# EAGLE board Sine 5KW 4 (EAGLE 6.6.0)
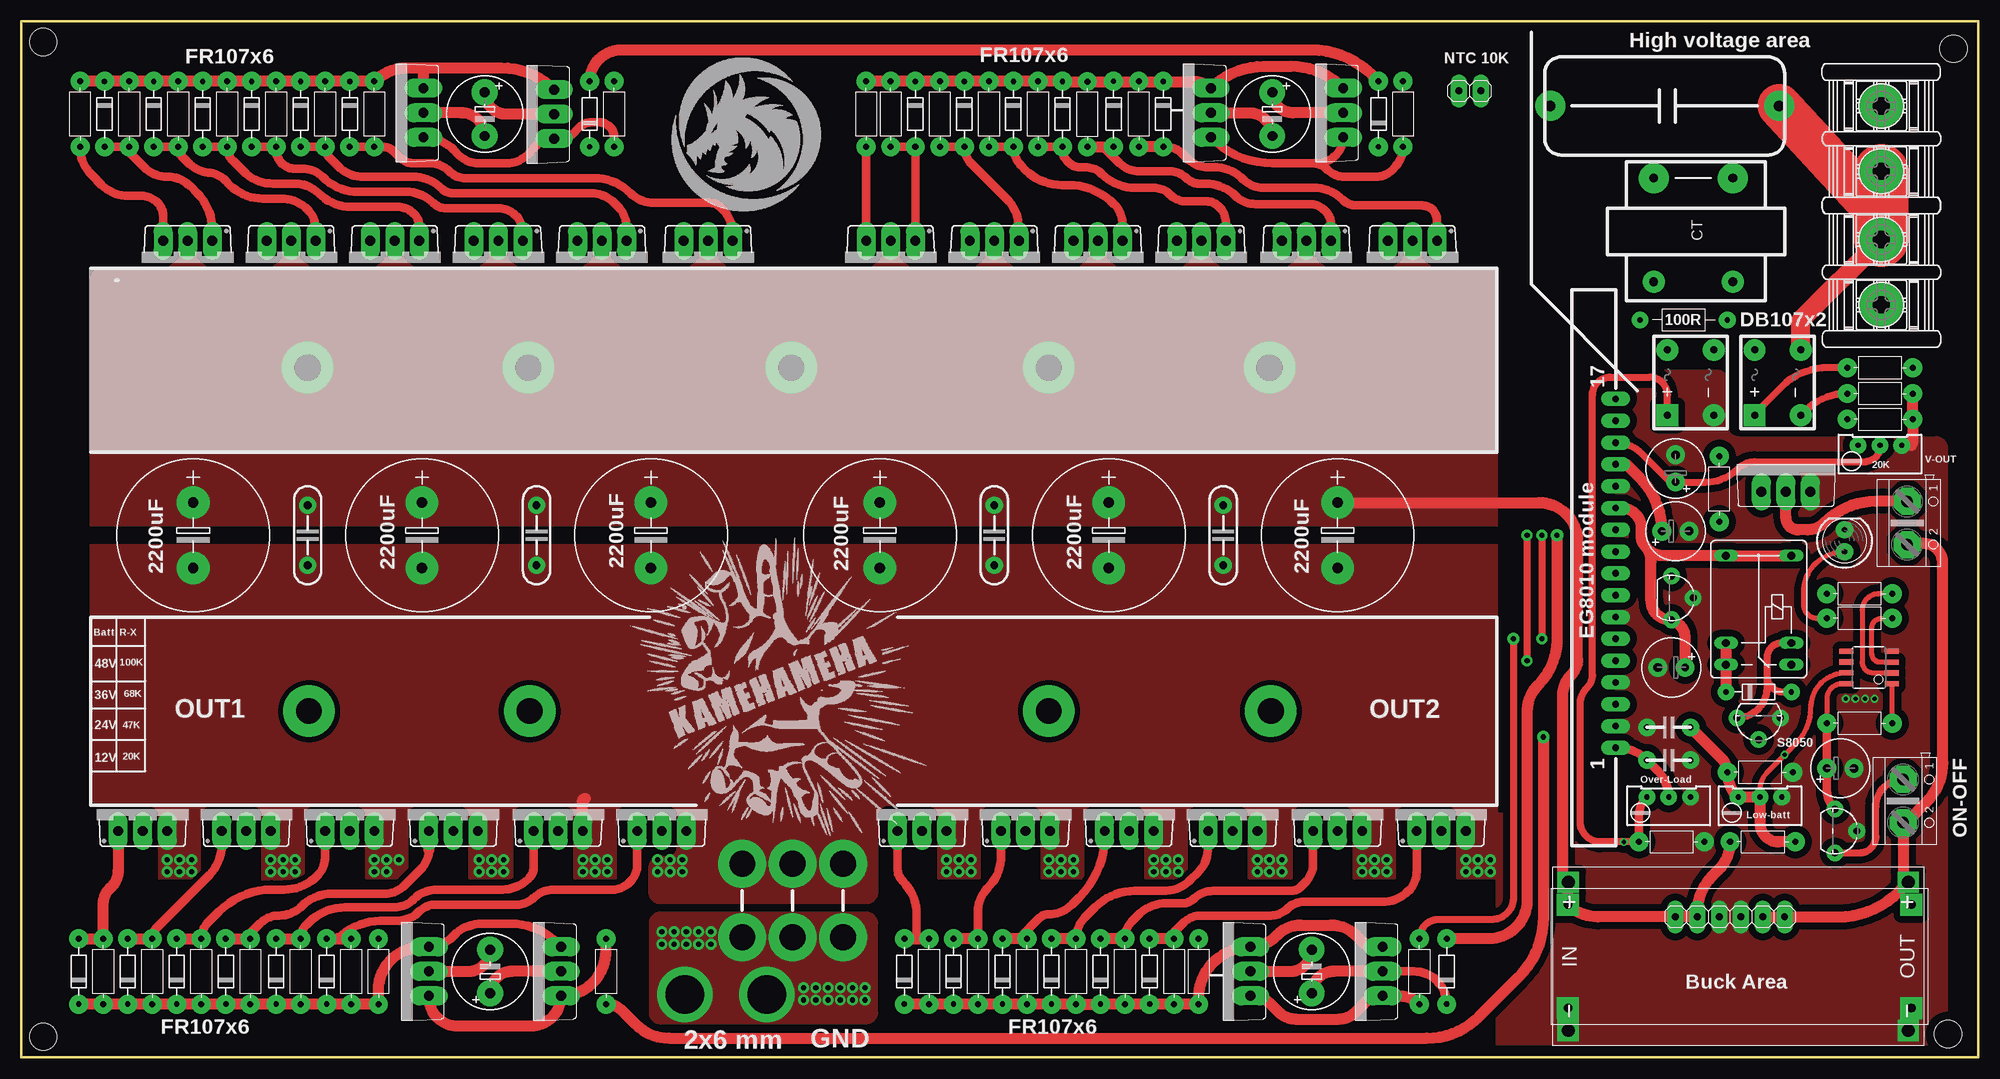
[diagram p0: board, top side]
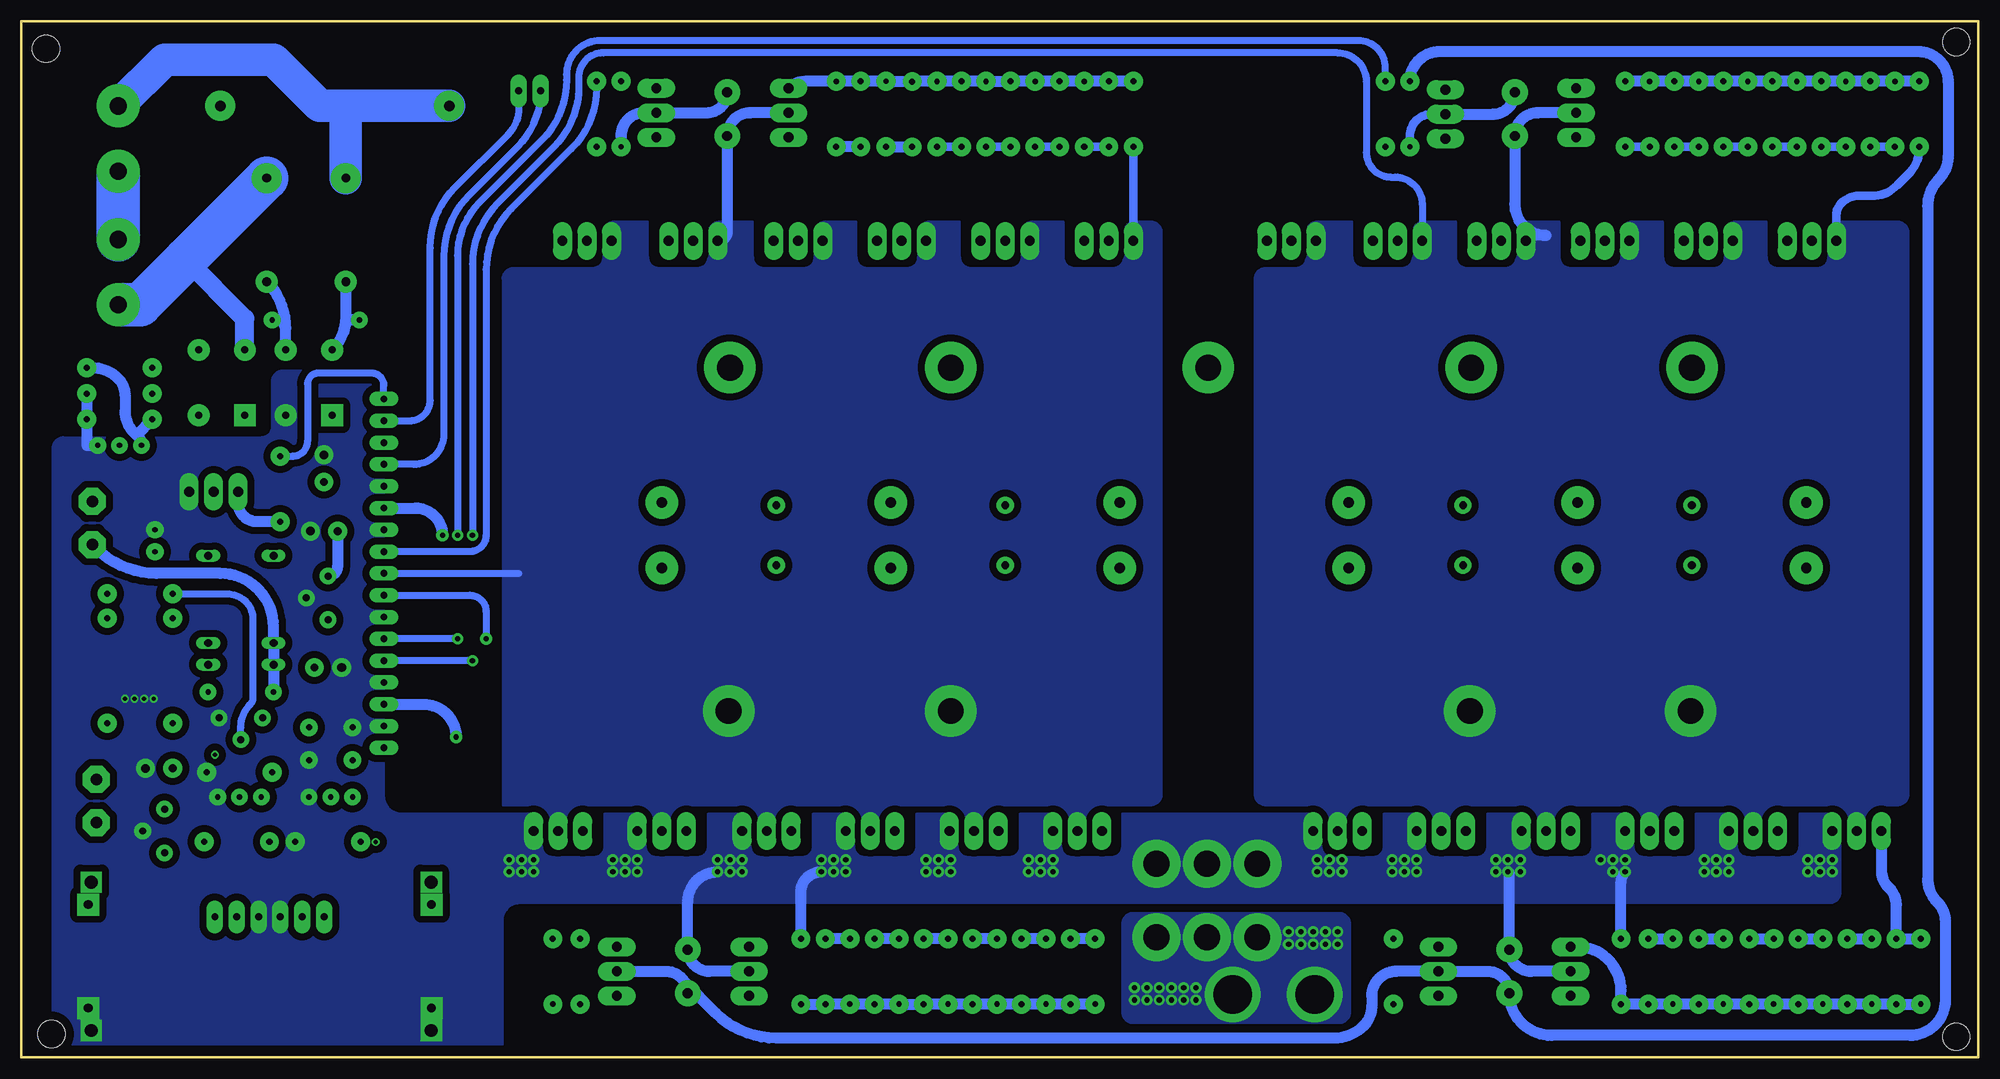
[diagram p1: board, bottom side, seen from below]

Size 227.97 x 120.65 mm. Coordinates in mm from the lower left corner, seen from the top.
Outline: 0,0 227.96,0 227.96,120.65 0,120.65 0,0
Copper layers (1*16): Top 0.035mm / dielectric 1.5mm / Bottom 0.035mm
Design rules "default": minimum track width 10mil, minimum drill 24mil, track to track 8mil, track to pad 8mil, pad to pad 8mil, via to via 8mil, smd to smd 8mil, copper to edge 40mil, drill to drill 8mil, minimum pad ring 10mil, minimum via ring 8mil, stop-mask expansion 4mil, vias tented up to drill 0mil, thermal gap 10mil
Holes 3.2 mm at 2.54,2.38 224.47,2.7 2.54,118.27 225.11,117.48

## Footprints (pad centres in the part's own frame; a part is rotated, then mirrored left to right if it is on the bottom)
LAIFET = drill 1 pad 3.5: P$1 -8.255,4.128; P$2 -8.255,-5.08 | drill 1 pad 2.54: P$4 3.81,-5.08; P$6 3.81,4.128
PINHEAD-2 = drill 0.813 pad 1.93 long: 1 -1.27,0; 2 1.27,0
DOMI-2 = drill 1.321 pad 3.15 octagon: 1 -2.515,0; 2 2.515,0
DC-DC-STEP-DOWN-LM2596 = drill 1.5 pad 2.5 square: IN+ -19.812,8.636; IN- -19.812,-8.636; OUT+ 19.812,8.636; OUT- 19.812,-8.636
E7,5-18 = drill 1.2 pad 3.81: + -3.81,0; - 3.81,0
E5-8,5 = drill 1.15 pad 3: + -2.54,0; - 2.54,0
E2,5-7 = drill 0.9 pad 2.184: + -1.587,0 | drill 1 pad 2.184: - 1.587,0
CAP-NP5 = drill 0.9 pad 2: 1 -3.175,0; 2 3.81,0
CAP-NP5' = drill 1.2 pad 3.5: 1 -6.985,-1.905; 2 19.685,-1.905
CAP-NP5'' = drill 0.7 pad 2.032: 1 -3.81,0; 2 1.27,0
D-7,5 = drill 0.7 pad 2.2: A 3.81,0 | drill 0.61 pad 2.2: C -3.81,0
D-7,5' = drill 0.61 pad 1.93: A 3.81,0; C -3.81,0
CAU-1A = drill 0.813 pad 2.54 square: + -2.857,2.54 | drill 0.813 pad 2.54: - -2.857,-2.857; AC1 4.763,2.54; AC2 4.763,-2.857
LITTLEFUSE = drill 3 pad 5.588: 1 -5.08,0; 2 3.493,0
TO92 = drill 0.813 pad 1.93: 1 2.54,0; 2 0,2.54; 3 -2.54,0
8S1 = smd 0.6 x 1.6: 1 -1.905,-2.654; 2 -0.645,-2.654; 3 0.625,-2.654; 4 1.895,-2.654; 5 1.905,2.654; 6 0.635,2.654; 7 -0.635,2.654; 8 -1.905,2.654
FRS1B = drill 0.914 long: 1 0,3.81; 2 0,-3.81; O -2.54,-3.81; P 10.16,3.81; P@ 10.16,-3.81; S -2.54,3.81
LED5 = drill 0.61 pad 2: A -1.27,0; K 1.27,0
TO220BV = drill 1.15 pad 2.184 long: D 0,-2.54; G -2.857,-2.54; S 2.857,-2.54
TIP-127 = drill 1.15 pad 2.184 long: 1 -2.857,0; 2 0,0; 3 2.857,0
R-7,5 = drill 0.7 pad 2.2: 1 -3.81,0; 2 3.81,0
RTRIM64W = drill 0.61 pad 1.93: 1 1.27,-2.54; 2 1.27,0; 3 1.27,2.54
R-7,5' = drill 0.61 pad 1.93: 1 -5.08,0; 2 5.08,0
EGS002 = drill 0.8 pad 1.676 long: P$1 -19.05,-1.27; P$2 -16.51,-1.27; P$3 -13.97,-1.27; P$4 -11.43,-1.27; P$5 -8.89,-1.27; P$6 -6.35,-1.27; P$7 -3.81,-1.27; P$8 -1.27,-1.27; P$9 1.27,-1.27; P$10 3.81,-1.27; P$11 6.35,-1.27; P$12 8.89,-1.27; P$13 11.43,-1.27; P$14 13.97,-1.27; P$15 16.51,-1.27; P$16 19.05,-1.27; P$17 21.59,-1.27
XL7015 = drill 1 pad 2.54 square: P$1 -19.685,5.715; P$2 -19.685,-6.35; P$3 20.32,-6.35; P$4 20.32,5.715
5202-03-N-02 = drill 2 pad 5: 1 -3.805,0; 2 3.81,0

## Placement (x,y rotation side)
1  TRANFO2222  [LAIFET]  195.26,94.14 270 top
12V  PINHEAD-2  [PINHEAD-2]  204.15,16.35 0 top
48V  PINHEAD-2  [PINHEAD-2]  193.99,16.35 0 top
+FAN-  +FAN-  [DOMI-2]  219.71,62.23 270 top
BUCK  LM2596  [DC-DC-STEP-DOWN-LM2596]  200.03,11.75 0 top
C1  [E7,5-18]  20,60.8 270 top
C2  [E7,5-18]  46.67,60.8 270 top
C3  [E7,5-18]  73.34,60.8 270 top
C4  [E7,5-18]  100.01,60.8 270 top
C5  [E7,5-18]  126.68,60.8 270 top
C6  [E7,5-18]  153.35,60.8 270 top
C7  220uF  [E5-8,5]  145.73,109.86 270 top
C8  220uF  [E5-8,5]  54.61,10 90 top
C9  220uF  [E5-8,5]  53.98,109.86 270 top
C10  220uF  [E5-8,5]  150.34,10 90 top
C11  100uF  [E2,5-7]  192.72,61.28 0 top
C12  100uF  [E2,5-7]  192.25,45.4 180 top
C14  100uF  [E2,5-7]  211.93,33.66 0 top
C15  104  [CAP-NP5]  33.34,60.48 90 top
C16  104  [CAP-NP5]  60.01,60.48 90 top
C17  104  [CAP-NP5]  140.02,60.48 90 top
C18  104  [CAP-NP5]  113.35,60.48 90 top
C20  2.5uF - 630V  [CAP-NP5']  197.8,108.9 180 top
C21  4.7uF/50V  [E2,5-7]  192.72,68.58 90 top
C22  104  [CAP-NP5'']  190.66,34.61 180 top
C24  104  [CAP-NP5'']  193.2,38.42 0 top
D1  FR207  [D-7,5]  166.05,10 90 top
D2  [D-7,5]  104.14,109.86 270 top
D3  [D-7,5]  109.86,109.86 270 top
D4  [D-7,5]  115.57,109.86 270 top
D5  1N4148  [D-7,5]  121.28,109.86 270 top
D6  1N4148  [D-7,5']  202.41,42.55 0 top
D7  FR107  [D-7,5]  102.87,10 90 top
D8  [D-7,5]  108.58,10 90 top
D9  [D-7,5]  114.3,10 90 top
D10  [D-7,5]  120.02,10 90 top
D11  [D-7,5]  23.81,10 90 top
D12  [D-7,5]  18.1,10 90 top
D13  [D-7,5]  12.38,10 90 top
D14  FR107  [D-7,5]  6.67,10 90 top
D15  FR107  [D-7,5]  131.45,10 90 top
D16  1N4148  [D-7,5]  26.83,109.86 270 top
D17  [D-7,5]  21.11,109.86 270 top
D18  [D-7,5]  15.4,109.86 270 top
D19  [D-7,5]  9.68,109.86 270 top
D20  FR107  [D-7,5]  125.73,10 90 top
D21  FR207  [D-7,5]  158.12,109.86 90 top
D22  FR207  [D-7,5]  66.2,109.86 90 top
D23  FR107  [D-7,5]  29.69,10 90 top
D24  FR107  [D-7,5]  35.56,10 90 top
D25  [D-7,5]  133.03,109.86 270 top
D26  [D-7,5]  127.25,109.86 270 top
D27  [D-7,5]  38.26,109.86 270 top
D28  [D-7,5]  32.54,109.86 270 top
DB-107  [CAU-1A]  204.47,77.63 90 top
DB_107  [CAU-1A]  194.31,77.63 90 top
F1  [LITTLEFUSE]  83.98,17.46 270 top
F2  [LITTLEFUSE]  89.85,17.46 270 top
F3  [LITTLEFUSE]  95.73,17.46 270 top
GND  PINHEAD-2  [PINHEAD-2]  199.07,16.35 0 top
IC2  7805  [TO92]  211.3,26.35 270 top
IC3  TINY13-20SSU  [8S1]  215.27,45.4 90 top
IC4  7805  [TO92]  192.25,53.5 270 top
K1  FRS1B  [FRS1B]  202.41,48.26 90 top
LED2  LED-5  [LED5]  212.41,60.17 90 top
NTC10K  PINHEAD-2  [PINHEAD-2]  168.75,112.55 180 top
Q2  IRF512  [TO220BV]  101.28,92.55 180 top
Q3  IRF512  [TO220BV]  113.35,92.55 180 top
Q4  IRF512  [TO220BV]  125.41,92.55 180 top
Q5  IRF512  [TO220BV]  137.48,92.55 180 top
Q6  2N4416  [TO92]  202.41,39.53 180 top
Q7  IRF512  [TO220BV]  104.93,28.89 0 top
Q8  IRF512  [TO220BV]  117,28.89 0 top
Q9  IRF512  [TO220BV]  129.06,28.89 0 top
Q10  IRF512  [TO220BV]  141.13,28.89 0 top
Q11  IRF512  [TO220BV]  165.42,28.89 0 top
Q12  IRF512  [TO220BV]  19.37,92.55 180 top
Q13  IRF512  [TO220BV]  31.43,92.55 180 top
Q14  IRF512  [TO220BV]  43.5,92.55 180 top
Q15  IRF512  [TO220BV]  55.56,92.55 180 top
Q16  IRF512  [TO220BV]  153.35,28.89 0 top
Q17  IRF512  [TO220BV]  14.13,28.89 0 top
Q18  IRF512  [TO220BV]  26.19,28.89 0 top
Q19  IRF512  [TO220BV]  38.26,28.89 0 top
Q20  IRF512  [TO220BV]  50.32,28.89 0 top
Q21  TIP42C  [TIP-127]  138.59,110.01 90 top
Q22  TIP41C  [TIP-127]  153.99,110.01 90 top
Q23  TIP42C  [TIP-127]  143.19,10 90 top
Q24  TIP41C  [TIP-127]  158.59,10 90 top
Q25  TIP42C  [TIP-127]  46.83,110.01 90 top
Q26  TIP41C  [TIP-127]  62.07,109.86 90 top
Q27  TIP42C  [TIP-127]  47.47,10 90 top
Q28  TIP41C  [TIP-127]  62.87,10 90 top
Q29  IRF512  [TO220BV]  62.55,28.89 0 top
Q30  TIP41C  [TIP-127]  205.58,65.88 0 top
Q31  IRF512  [TO220BV]  74.61,28.89 0 top
Q32  IRF512  [TO220BV]  162.08,92.55 180 top
Q33  IRF512  [TO220BV]  149.7,92.55 180 top
Q34  IRF512  [TO220BV]  80.01,92.55 180 top
Q35  IRF512  [TO220BV]  67.63,92.55 180 top
R1  10K  [R-7,5]  214.15,38.89 0 top
R2  4.7  [R-7,5]  101.28,109.86 270 top
R3  4.7  [R-7,5]  107,109.86 270 top
R4  4.7  [R-7,5]  112.71,109.86 270 top
R5  4.7  [R-7,5]  118.43,109.86 270 top
R6  20K  [R-7,5]  216.54,74.3 0 top
R7  4.7  [R-7,5]  105.73,10 90 top
R8  4.7  [R-7,5]  111.44,10 90 top
R9  4.7  [R-7,5]  117.16,10 90 top
R10  4.7  [R-7,5]  122.87,10 90 top
R11  4.7  [R-7,5]  26.67,10 270 top
R12  4.7  [R-7,5]  20.95,10 270 top
R13  4.7  [R-7,5]  15.24,10 270 top
R14  4.7  [R-7,5]  9.53,10 270 top
R15  100K  [R-7,5]  216.54,80.33 0 top
R16  4.7  [R-7,5]  29.69,109.86 90 top
R17  4.7  [R-7,5]  23.97,109.86 90 top
R18  4.7  [R-7,5]  18.26,109.86 90 top
R19  4.7  [R-7,5]  12.54,109.86 90 top
R20  100K  [R-7,5]  216.54,77.31 0 top
R21  10K  [R-7,5]  98.42,109.86 270 top
R22  10k  [R-7,5]  137.16,10 90 top
R23  10k  [R-7,5]  41.59,10 270 top
R24  10k  [R-7,5]  6.83,109.86 90 top
R25  100R  [R-7,5]  160.97,109.86 270 top
R26  100R  [R-7,5]  162.88,10 270 top
R27  100R  [R-7,5]  69.06,109.86 270 top
R28  100R  [R-7,5]  68.1,10 90 top
R29  1K  [R-7,5]  214.15,51.12 0 top
R30  1K  [R-7,5]  197.8,66.2 270 top
R32  [RTRIM64W]  202.57,29.05 90 top
R33  R-X  [R-7,5]  202.88,25.08 180 top
R34  20K  [R-7,5]  202.57,33.18 180 top
R35  1K  [R-7,5]  214.15,53.98 0 top
R36  4.7  [R-7,5]  134.3,10 90 top
R37  20K  [RTRIM64W]  191.93,29.05 90 top
R38  100R  [R-7,5']  193.68,85.88 180 top
R39  4.7  [R-7,5]  128.59,10 90 top
R40  20K  [R-7,5]  192.25,25.08 180 top
R41  4.7  [R-7,5]  32.54,10 270 top
R42  4.7  [R-7,5]  38.42,10 270 top
R43  4.7  [R-7,5]  130.18,109.86 270 top
R44  4.7  [R-7,5]  124.18,109.84 270 top
R45  4.7  [R-7,5]  41.12,109.86 90 top
R46  4.7  [R-7,5]  35.4,109.86 90 top
SW-ON-OFF  [DOMI-2]  219.23,29.84 270 top
U$11  EGS002  [EGS002]  184.47,55.09 90 top
U$29  XL7015  [XL7015]  199.87,12.06 0 top
V-OUT  [RTRIM64W]  216.54,70.01 90 top
X1  IN 220V  [5202-03-N-02]  216.69,107 90 top
X2  OUT 220V  [5202-03-N-02]  216.69,91.44 90 top

## Library data of the parts
1 12V 48V +FAN- C1-C12 C14 C21 C22 C24 GND NTC10K Q2-Q5 Q7-Q35 R37 SW-ON-OFF U$11 V-OUT = LBR inverter true sine
BUCK = diy-modules
C15-C18 DB-107 DB_107 Q6 R38 = lbr
C20 D6 IC2 IC4 LED2 R1-R30 R32-R36 R39-R46 = chuong
D1-D5 D7-D28 = 4148
F1-F3 = LBR inverter true sine; OC_FARNELL: unknown; OC_NEWARK: unknown
IC3 = atmel; MPN: ATTINY13-20SSU; OC_FARNELL: 1455133; OC_NEWARK: 58M3771
K1 = relay; OC_FARNELL: unknown; OC_NEWARK: unknown
U$29 = XL7015
X1 X2 = lbr; OC_FARNELL: unknown; OC_NEWARK: unknown

## Nets
+3V3: C8.+ C10.+ D1.C D21.A D22.A Q24.2 Q28.2
+5V: C11.+ IC4.3 NTC10K.2 U$11.P$14
+12V: C12.+ D1.A IC4.1 K1.P K1.P@ U$11.P$12
+15V: 12V.1 12V.2 +FAN-.2 BUCK.OUT+ D6.C K1.1 K1.S SW-ON-OFF.2
+24V: 48V.1 48V.2 BUCK.IN+ C1.+ C2.+ C3.+ C4.+ C5.+ C6.+ C15.2 C16.2 C17.2 C18.2 Q2.D Q3.D Q4.D Q5.D Q12.D Q13.D Q14.D Q15.D Q32.D Q33.D Q34.D Q35.D R33.2 U$29.P$1
GND: BUCK.IN- BUCK.OUT- C1.- C2.- C3.- C4.- C5.- C6.- C8.- C10.- C11.- C12.- C14.- C15.1 C16.1 C17.1 C18.1 C21.- C22.1 C24.1 DB_107.- F1.1 F2.1 F3.1 GND.1 GND.2 IC2.2 IC3.4 IC4.2 LED2.K Q6.3 Q7.S Q8.S Q9.S Q10.S Q11.S Q16.S Q17.S Q18.S Q19.S Q20.S Q23.2 Q27.2 Q29.S Q30.3 Q31.S R6.2 R20.2 R22.2 R23.1 R32.1 R34.1 R37.1 R40.1 U$11.P$2 U$11.P$4 U$11.P$7 U$11.P$11 U$11.P$13 U$29.P$2 U$29.P$3 V-OUT.1
N$1: D27.A Q34.G R45.1
N$2: C9.+ D22.C Q26.2
N$3: R28.1 U$11.P$3
N$4: D7.C D8.C D9.C D10.C D15.C D20.C Q23.3 Q24.3 R7.1 R8.1 R9.1 R10.1 R22.1 R36.1 R39.1
N$5: D13.A Q18.G R13.1
N$6: R6.1 R15.2 V-OUT.3
N$7: D2.A Q2.G R2.2
N$8: D3.A Q3.G R3.2
N$9: D4.A Q4.G R4.2
N$10: D5.A Q5.G R5.2
N$11: F1.2 F2.2 F3.2
N$12: D7.A Q7.G R7.2
N$13: D8.A Q8.G R8.2
N$14: D9.A Q9.G R9.2
N$15: D10.A Q10.G R10.2
N$16: D11.A Q20.G R11.1
N$17: D12.A Q19.G R12.1
N$18: C9.- Q12.S Q13.S Q14.S Q15.S Q17.D Q18.D Q19.D Q20.D Q25.2 Q29.D Q31.D Q34.S Q35.S R24.1 U$11.P$5
N$19: D16.A Q15.G R16.1
N$20: D17.A Q14.G R17.1
N$21: D18.A Q13.G R18.1
N$22: D19.A Q12.G R19.1
N$24: D14.A Q17.G R14.1
N$25: R25.1 U$11.P$10
N$26: R30.1 U$11.P$17
N$27: R26.1 U$11.P$8
N$28: D11.C D12.C D13.C D14.C D23.C D24.C Q27.3 Q28.3 R11.2 R12.2 R13.2 R14.2 R23.2 R41.2 R42.2
N$29: D16.C D17.C D18.C D19.C D27.C D28.C Q25.3 Q26.3 R16.2 R17.2 R18.2 R19.2 R24.2 R45.2 R46.2
N$30: R27.1 U$11.P$6
N$31: Q21.1 Q22.1 R25.2
N$32: Q23.1 Q24.1 R26.2
N$33: Q25.1 Q26.1 R27.2
N$34: Q27.1 Q28.1 R28.2
N$35: C7.- Q2.S Q3.S Q4.S Q5.S Q7.D Q8.D Q9.D Q10.D Q11.D Q16.D Q21.2 Q32.S Q33.S R21.2 U$11.P$9
N$36: C7.+ D21.C Q22.2
N$37: Q30.1 R30.2
N$38: C14.+ IC2.3 IC3.8 R1.1
N$39: C20.1 DB-107.AC2 X1.1 X2.2
N$40: C21.+ U$11.P$15 V-OUT.2
N$41: +FAN-.1 Q30.2
N$42: IC2.1 SW-ON-OFF.1
N$43: IC3.1 R1.2
N$45: DB-107.+ R15.1
N$47: DB-107.- R20.1
N$48: NTC10K.1 U$11.P$16
N$49: IC3.3 R29.2
N$50: 1.P$1 DB-107.AC1 X2.1
N$51: D6.A K1.2 Q6.1
N$52: 1.P$2 C20.2 X1.2
N$53: LED2.A R29.1
N$54: Q6.2 R35.1
N$55: 1.P$6 DB_107.AC2 R38.1
N$56: 1.P$4 DB_107.AC1 R38.2
N$57: DB_107.+ R37.3 R40.2
N$58: IC3.2 R35.2
N$59: C22.2 R37.2 U$11.P$1
N$60: C24.2 IC3.7 R32.2 R32.3 R33.1 R34.2
N$62: D15.A Q11.G R36.2
N$63: D20.A Q16.G R39.2
N$64: D23.A Q29.G R41.1
N$65: D24.A Q31.G R42.1
N$66: D25.A Q32.G R43.2
N$67: D26.A Q33.G R44.2
N$68: D2.C D3.C D4.C D5.C D25.C D26.C Q21.3 Q22.3 R2.1 R3.1 R4.1 R5.1 R21.1 R43.1 R44.1
N$69: D28.A Q35.G R46.1

## Tracks (layer width: path | path; a pad name or v marks a point on that pad's centre or on a via)
+3V3
  Top 1.016: Q24.2 162.24,10 arc-90 D1.C
  Top 1.27: Q28.2 57.15,10 arc90 C8.+ | Q24.2 152.88,10 arc90 C10.+ | D21.A 157.39,114.39 arc45 150.32,117.32 69.85,117.32 arc90 D22.A
  Bottom 1.27: Q24.2 152.88,10 arc90 C10.+ arc45 150.65,8.23 150.65,8.73 147.07,5.15 arc-45 140,2.22 75.05,2.22 arc-45 71.6,3.65 arc-45 70.64,5.95 70.64,7.14 arc90 67.79,10 Q28.2 57.15,10 arc90 C8.+ arc-90 49.69,2.54 7.94,2.54 arc-90 3.81,6.67 3.81,15.8 arc-45 4.76,18.1 arc45 5.87,20.78 5.87,99.17 arc45 4.6,102.24 arc-45 3.49,104.92 3.49,113.67 arc-90 6.98,117.16 62.71,117.16 arc-90 D22.A
+5V
  Top 1.27: C11.+ arc45 188.55,67.51 187.01,69.06 U$11.P$14
  Bottom 0.813: NTC10K.2 arc45 170.17,106.05 175.82,100.4 arc-45 178.75,93.33 178.75,72.55 arc90 182.24,69.06 U$11.P$14
  Bottom 1.27: C11.+ 191.13,57.15 arc90 IC4.3
+12V  (via drill 0.6 pad 1.42)
  Top 1.27: v178.91,60.8 178.91,48.7 arc-45 176.69,43.34 arc45 175.42,40.27 175.42,18.26 arc-90 170.97,13.81 D1.A | 188.75,60.96 188.75,61.6 arc90 186.37,63.98 U$11.P$12 | K1.P@ K1.P 191.29,58.42 arc-90 188.75,60.96 | 188.75,60.96 188.75,60.46 arc45 189.07,59.69 arc-45 189.86,57.77 189.86,53.18 arc90 192.09,50.96 IC4.1 191.77,50.96 arc-90 193.83,48.9 C12.+
  Bottom 1.27: U$11.P$12 182.09,63.98 arc90 v178.91,60.8
+15V
  Top 1.27: 12V.1 12V.2 211.66,16.35 arc45 218.73,19.28 219.42,19.97 | 219.42,19.97 BUCK.OUT+ | 219.42,19.97 arc-45 219.23,20.43 SW-ON-OFF.2 arc45 219.82,27.57 221.82,29.57 arc45 223.84,34.45 223.84,57.63 arc90 221.61,59.85 219.84,59.85 arc90 +FAN-.2 | K1.1 K1.S D6.C
  Bottom 1.27: D6.C K1.S K1.1 198.6,50.17 arc-90 204.79,56.36 212.21,56.36 arc45 219.28,59.29 +FAN-.2
+24V  (via drill 3 pad 6)
  Top 1.27: 146.05,79.69 arc-90 v145.41,80.33 | U$29.P$1 180.18,20.35 BUCK.IN+ | U$29.P$1 180.18,19.49 arc45 179.7,20.64 arc-45 179.55,21.02 179.55,42.15 arc-45 180.5,44.45 arc45 181.29,46.37 181.29,55.85 | R33.2 arc-45 197.73,21.83 197.01,21.11 arc45 195.26,16.9 48V.2 48V.1 183.63,16.35 arc-45 U$29.P$1 | 181.29,55.85 arc90 181.29,55.85 | C6.+ 176.82,64.61 arc-90 181.29,60.14 181.29,55.85 | 181.29,55.85 arc90 181.29,55.85
  other vias: 33.34,80.33 59.05,80.33 119.7,80.33 89.69,80.33
  pour Top (isolate 0.762, no thermals): 8.1,61.91 8.1,90.65 arc-90 9.37,91.92 17.14,91.92 18.41,93.19 18.41,96.36 20.32,96.36 20.32,93.19 21.59,91.92 29.21,91.92 30.48,93.19 30.48,96.36 32.38,96.36 32.38,93.19 33.66,91.92 41.27,91.92 42.55,93.19 42.55,96.36 44.45,96.36 44.45,93.19 45.72,91.92 53.34,91.92 54.61,93.19 54.61,96.36 56.52,96.36 56.52,93.19 57.78,91.92 65.41,91.92 66.67,93.19 66.67,96.36 68.58,96.36 68.58,93.19 69.85,91.92 77.79,91.92 79.06,93.19 79.06,96.36 80.96,96.36 80.96,93.19 82.23,91.92 99.06,91.92 100.33,93.19 100.33,96.36 102.23,96.36 102.23,93.19 103.5,91.92 111.12,91.92 112.39,93.19 112.39,96.36 114.3,96.36 114.3,93.19 115.57,91.92 123.19,91.92 124.46,93.19 124.46,96.36 126.36,96.36 126.36,93.19 127.64,91.92 135.26,91.92 136.53,93.19 136.53,96.36 138.43,96.36 138.43,93.19 139.7,91.92 147.48,91.92 148.75,93.19 148.75,96.36 150.65,96.36 150.65,93.19 151.92,91.92 159.86,91.92 161.13,93.19 161.13,96.36 163.04,96.36 163.04,93.19 164.31,91.92 171.93,91.92 171.93,61.91
GND  (via drill 0.5, 0.6 pad 1.27)
  Top 1.27: Q29.S 65.4,30 65.56,30.16 65.72,30.16 | Q27.2 52.07,10 arc90 C8.- | Q23.2 147.8,10 arc90 C10.- | R20.2 R6.2 220.34,71.66 arc-45 220.19,71.28 V-OUT.1
  Bottom 1.27: v54.77,21.59 arc45 54.61,21.21 C8.- arc-90 52.07,10 Q27.2 | R23.1 41.59,20.44 arc45 v41.12,21.59 | R22.2 137.16,19.21 arc90 v134.78,21.59 | 147.8,10 arc90 C10.- | Q23.2 147.8,10 | 147.8,10 arc90 C10.- | C10.- 150.34,18.1 arc90 v146.84,21.59 | R20.2 R6.2 220.34,71.28 V-OUT.1
  other vias: 16.99,23.02 18.41,23.02 19.84,23.02 30.48,23.02 29.05,23.02 31.91,23.02 41.12,23.02 42.55,23.02 43.97,23.02 53.34,23.02 54.77,23.02 56.2,23.02 65.41,23.02 66.83,23.02 68.26,23.02 107.79,23.02 109.22,23.02 110.65,23.02 119.7,23.02 121.13,23.02 131.92,23.02 133.35,23.02 134.78,23.02 143.99,23.02 145.42,23.02 146.84,23.02 156.21,23.02 157.64,23.02 159.07,23.02 168.28,23.02 169.7,23.02 171.13,23.02 74.14,23.02 75.56,23.02 76.99,23.02 16.99,21.59 18.41,21.59 19.84,21.59 42.55,21.59 53.34,21.59 56.2,21.59 65.41,21.59 66.83,21.59 68.26,21.59 74.14,21.59 75.56,21.59 76.99,21.59 107.79,21.59 109.22,21.59 110.65,21.59 119.7,21.59 131.92,21.59 133.35,21.59 143.99,21.59 145.42,21.59 156.21,21.59 157.64,21.59 159.07,21.59 168.28,21.59 169.7,21.59 171.13,21.59 29.05,21.59 30.48,21.59 31.91,21.59 122.55,23.02 121.13,21.59 122.55,21.59 212.57,41.75 213.68,41.75 214.79,41.75 215.9,41.75
  pour Top (isolate 0.61, no thermals): 8.1,59.69 171.93,59.69 171.93,20.8 167.32,20.8 167.32,28.1 arc90 166.05,29.37 161.29,29.37 arc90 160.02,28.1 160.02,20.8 155.26,20.8 155.26,28.1 arc90 153.99,29.37 149.23,29.37 arc90 147.96,28.1 147.96,20.8 143.03,20.8 143.03,28.1 arc90 141.76,29.37 137,29.37 arc90 135.73,28.1 135.73,20.8 130.97,20.8 130.97,28.1 arc90 129.7,29.37 124.94,29.37 arc90 123.67,28.1 123.67,20.8 118.9,20.8 118.9,28.1 arc90 117.63,29.37 112.87,29.37 arc90 111.6,28.1 111.6,20.8 106.84,20.8 106.84,28.1 arc90 105.57,29.37 100.97,29.37 arc90 99.69,28.1 99.69,19.21 arc-90 98.42,17.94 74.45,17.94 arc-90 73.18,19.21 73.18,22.07 arc-90 74.45,23.34 75.25,23.34 arc90 76.52,24.61 76.52,28.1 arc90 75.25,29.37 70.48,29.37 arc90 69.22,28.1 69.22,20.8 64.45,20.8 64.45,28.1 arc90 63.18,29.37 58.42,29.37 arc90 57.15,28.1 57.15,20.8 52.23,20.8 52.23,28.1 arc90 50.96,29.37 46.2,29.37 arc90 44.93,28.1 44.93,20.8 40.16,20.8 40.16,28.1 arc90 38.89,29.37 34.13,29.37 arc90 32.86,28.1 32.86,20.64 28.1,20.64 28.1,28.1 arc90 26.83,29.37 22.07,29.37 arc90 20.8,28.1 20.8,20.8 16.03,20.8 16.03,28.1 arc90 14.76,29.37 9.37,29.37 arc-90 8.1,30.64
  pour Bottom (isolate 0.813, no thermals): 20.8,28.42 17.3,28.42 arc90 16.03,27.15 16.03,19.21 arc90 17.3,17.94 169.93,17.94 arc-90 171.93,15.94 171.93,1.43 224.31,1.43 224.31,70.96 arc90 223.04,72.23 200.03,72.23 arc-90 198.76,73.5 198.76,78.74 arc90 197.49,80.01 187.01,80.01 arc90 185.74,78.74 185.74,30.42 arc-90 183.74,28.42 168.59,28.42 arc90 167.32,27.15 167.32,24.61 arc-90 166.05,23.34 161.29,23.34 arc-90 160.02,24.61 160.02,28.42 156.53,28.42 arc90 155.26,27.15 155.26,24.61 arc-90 153.99,23.34 149.23,23.34 arc-90 147.96,24.61 147.96,28.42 144.3,28.42 arc90 143.03,27.15 143.03,24.61 arc-90 141.76,23.34 137,23.34 arc-90 135.73,24.61 135.73,28.42 132.24,28.42 arc90 130.97,27.15 130.97,24.61 arc-90 129.7,23.34 124.94,23.34 arc-90 123.67,24.61 123.67,28.42 120.17,28.42 arc90 118.9,27.15 118.9,24.61 arc-90 117.63,23.34 112.87,23.34 arc-90 111.6,24.61 111.6,28.42 108.11,28.42 arc90 106.84,27.15 106.84,24.61 arc-90 105.57,23.34 100.97,23.34 arc-90 99.69,24.61 99.69,28.42 77.79,28.42 arc90 76.52,27.15 76.52,24.61 arc-90 75.25,23.34 70.48,23.34 arc-90 69.22,24.61 69.22,28.42 65.72,28.42 arc90 64.45,27.15 64.45,24.61 arc-90 63.18,23.34 58.42,23.34 arc-90 57.15,24.61 57.15,28.42 53.62,28.42 arc88 52.35,27.19 52.27,24.57 arc-88 51,23.34 46.2,23.34 arc-90 44.93,24.61 44.93,28.42 41.43,28.42 arc90 40.16,27.15 40.16,24.61 arc-90 38.89,23.34 34.13,23.34 arc-90 32.86,24.61 32.86,28.42 29.37,28.42 arc90 28.1,27.15 28.1,24.61 arc-90 26.83,23.34 22.07,23.34 arc-90 20.8,24.61
  pour Top (isolate 0.813, no thermals): 185.74,28.42 185.74,78.74 arc-90 187.01,80.01 197.49,80.01 arc-90 198.76,78.74 198.76,73.5 arc90 200.03,72.23 223.04,72.23 arc-90 224.31,70.96 224.31,1.43 171.93,1.43 171.93,28.42
N$1
  Top 1.016: D27.A R45.1 42.06,106.05 arc-45 43.43,105.48 44.13,104.78 arc45 45.67,104.14 47.62,104.14 arc-45 49.79,103.24 49.85,103.19 arc45 51.76,102.39 66.75,102.39 arc-45 70.96,100.65 arc45 73.64,99.54 80.06,99.54 arc-45 81.6,98.9 arc-45 82.87,95.84 Q34.G
  Bottom 1.016: R45.1 D27.A
N$2
  Top 1.27: Q26.2 56.51,109.86 arc-90 C9.+
  Bottom 1.016: Q26.2 63.66,109.86 arc-90 66.2,107.32 D22.C
  Bottom 1.27: Q26.2 56.51,109.86 arc-90 C9.+
N$3  (via drill 0.6 pad 1.42)
  Top 1.27: v177.32,37.31 177.32,16.37 arc-45 174.39,9.29 169.86,4.76 arc-45 163.73,2.22 75.43,2.22 arc-45 71.6,3.81 70,5.41 arc45 R28.1
  Bottom 1.27: U$11.P$3 181.13,41.12 arc90 v177.32,37.31
N$4
  Top 1.27: D7.C R7.1 D8.C R8.1 D9.C R9.1 D10.C R10.1 D20.C R39.1 D15.C R36.1 R22.1 137.16,6.83 arc-90 Q23.3 arc45 146.17,14.09 146.37,14.29 arc-45 149.05,15.4 152.56,15.4 arc-45 155.54,14.16 156.37,13.34 arc45 157.52,12.86 Q24.3
  Bottom 1.27: D7.C R7.1 D8.C R8.1 D9.C R9.1 D10.C R10.1 D20.C R39.1 D15.C R36.1 R22.1
N$5
  Top 1.016: Q18.G 23.34,24.72 arc-45 21.91,21.27 15.8,15.17 arc45 R13.1
  Top 1.27: D13.A R13.1
  Bottom 1.27: R13.1 D13.A
N$6
  Bottom 1.27: R15.2 219.76,80.33 arc45 216.69,79.06 arc45 215.9,77.14 215.9,75.25 arc-45 214.89,72.81 214.55,72.47 | 214.55,72.47 214.15,72.07 214.15,71.66 arc-45 V-OUT.3 | R6.1 214.55,72.47
N$7
  Top 1.016: R2.2 D2.A Q2.G
  Bottom 1.016: D2.A R2.2
N$8
  Top 1.016: R3.2 D3.A arc45 110.64,104.15 114.78,100.01 arc-45 116.2,96.56 Q3.G
  Bottom 1.016: D3.A R3.2
N$9
  Top 1.016: R4.2 D4.A arc45 116.47,103.88 117,103.35 arc45 121.21,101.6 121.95,101.6 arc-45 127.32,99.38 arc-45 128.27,97.08 Q4.G
  Bottom 1.016: R4.2 D4.A
N$10
  Top 1.016: Q5.G 140.33,97.14 arc45 139.54,99.06 arc45 138.01,99.7 135.74,99.7 arc-45 133.83,100.49 arc45 131.91,101.28 129.72,101.28 arc-45 125.89,102.87 arc45 123.97,103.66 123.45,103.66 arc-45 121.92,104.3 arc-45 121.28,105.83 D5.A R5.2
  Bottom 1.016: D5.A R5.2
N$11  (via drill 0.6 pad 1.27, 4.5 pad 6.45)
  other vias: 74.61,14.61 77.31,7.3 86.84,7.3 76.04,14.61 77.47,14.61 78.9,14.61 80.33,14.61 74.61,13.18 76.04,13.18 77.47,13.18 78.9,13.18 80.33,13.18 92.55,8.1 93.98,8.1 95.41,8.1 96.84,8.1 98.27,8.1 92.55,6.67 93.98,6.67 95.41,6.67 96.84,6.67 98.27,6.67 91.12,8.1 91.12,6.67
  pour Top (no thermals): 73.18,15.56 73.18,5.24 arc90 74.45,3.97 98.42,3.97 arc90 99.69,5.24 99.69,15.56 arc90 98.42,16.83 74.45,16.83 arc90
  pour Bottom (no thermals): 73.18,15.56 73.18,5.24 arc90 74.45,3.97 98.42,3.97 arc90 99.69,5.24 99.69,15.56 arc90 98.42,16.83 74.45,16.83 arc90
N$12
  Top 1.016: Q7.G 102.08,22.01 arc45 102.71,20.48 arc-45 104.3,16.65 104.3,13.81
  Top 1.27: D7.A 104.3,13.81 R7.2
  Bottom 1.27: D7.A R7.2
N$13
  Top 1.016: Q8.G 114.14,23.52 arc-45 112.55,19.69 arc45 111.44,17 R8.2
  Top 1.27: R8.2 D8.A
  Bottom 1.27: D8.A R8.2
N$14
  Top 1.016: Q9.G 126.21,25.73 arc-45 123.28,18.66 122.41,17.79 arc-45 119.7,16.67 arc45 118.61,16.22 116.2,13.81
  Top 1.27: R9.2 116.2,13.81 D9.A
  Bottom 1.27: D9.A R9.2
N$15
  Top 1.016: R10.2 arc-45 123.88,16.25 125.09,17.46 arc-45 129.69,19.37 133.03,19.37 arc45 136.28,20.71 137,21.43 arc45 138.27,24.5 Q10.G
  Top 1.27: R10.2 D10.A
  Bottom 1.27: D10.A R10.2
N$16
  Top 1.016: 26.03,13.81 27.84,15.61 arc-45 30,16.51 30.02,16.51 arc45 32.7,17.62 arc-45 36.15,19.05 42.31,19.05 arc45 44.61,20 46.57,21.96 arc45 47.47,24.13
  Top 1.27: D11.A 26.03,13.81 R11.1 | Q20.G 47.47,24.13
  Bottom 1.27: R11.1 D11.A
N$17
  Top 1.016: 35.4,25.4 35.4,23.41 arc-45 34.45,21.11 arc-45 30.62,19.53 29.15,19.53 arc45 23.02,16.99 21.74,15.71 arc45 R12.1
  Top 1.27: D12.A R12.1 | Q19.G 35.4,25.4
  Bottom 1.27: R12.1 D12.A
N$18  (via drill 0.6 pad 1.27, 3 pad 6)
  Top 0.813: v175.42,60.8 v175.42,46.2
  Top 1.016: R24.1 arc45 8.17,102.79 9.37,101.6 arc45 12.43,100.33 13.96,100.33 arc-45 15.87,99.54 arc-45 16.51,98 Q12.S
  Top 1.27: C9.- arc90 51.28,110.01 Q25.2
  Bottom 0.813: v175.42,60.8 175.42,92.38 arc45 172.49,99.45 165.96,105.97 arc-45 163.04,113.04 163.04,114.14 arc90 160.18,117 74.63,117 arc90 71.27,113.64 71.27,105.38 arc-90 68.41,102.53 67.94,102.53 arc90 64.76,99.35 Q35.S arc90 Q35.S | v175.42,46.2 U$11.P$5
  Bottom 1.016: R24.1 arc45 8.17,102.79 9.4,101.56 arc45 12.38,100.33 13.96,100.33 arc-45 15.87,99.54 15.95,99.46 arc-45 16.51,98.11 Q12.S
  Bottom 1.27: Q25.2 51.28,110.01 arc-90 C9.- 53.97,99.38 arc-90 50.32,95.73 52.07,95.73 arc-90 Q15.S
  other vias: 33.5,40.32 59.21,40.32
  pour Bottom (isolate 0.813, no thermals): 11.91,29.37 9.37,29.37 arc-90 8.1,30.64 8.1,96.04 arc-90 9.37,97.31 16.19,97.31 arc-90 17.46,96.04 17.46,93.19 arc90 18.73,91.92 23.34,91.92 arc90 24.61,93.19 24.61,97.31 28.26,97.31 arc-90 29.53,96.04 29.53,93.19 arc90 30.8,91.92 35.4,91.92 arc90 36.67,93.19 36.67,97.31 40.32,97.31 arc-90 41.59,96.04 41.59,93.19 arc90 42.86,91.92 47.47,91.92 arc90 48.74,93.19 48.74,97.31 52.55,97.31 arc-90 53.82,96.04 53.82,93.19 arc90 55.09,91.92 59.53,91.92 arc90 60.8,93.19 60.8,97.31 64.61,97.31 arc-90 65.88,96.04 65.88,93.19 arc90 67.15,91.92 71.6,91.92 arc90 72.87,93.19 72.87,97.31 76.99,97.31 arc-90 78.26,96.04 78.26,93.19 arc90 79.53,91.92 83.03,91.92 arc-90 84.3,90.65 84.3,30.64 arc-90 83.03,29.37 76.83,29.37 75.56,28.1 75.56,25.08 73.66,25.08 73.66,28.1 72.39,29.37 64.77,29.37 63.5,28.1 63.5,25.08 61.59,25.08 61.59,28.1 60.33,29.37 52.55,29.37 51.28,28.1 51.28,25.24 49.37,25.24 49.37,28.1 48.1,29.37 40.48,29.37 39.21,28.1 39.21,25.24 37.31,25.24 37.31,28.1 36.04,29.37 28.42,29.37 27.15,28.1 27.15,25.08 25.24,25.08 25.24,28.1 23.97,29.37 16.35,29.37 15.08,28.1 15.08,25.08 13.18,25.08 13.18,28.1
N$19
  Top 1.016: D16.A R16.1 29.69,105.67 arc45 30.32,104.14 arc45 31.85,103.51 32.78,103.51 arc-45 35.08,102.55 arc45 39.3,100.81 44.88,100.81 arc-45 47.94,99.54 arc45 49.48,98.9 55.56,98.9 arc-90 58.42,96.04 Q15.G
  Bottom 1.016: R16.1 D16.A
N$20
  Top 1.016: D17.A R17.1 arc45 24.64,104.42 25.88,103.19 arc45 29.33,101.76 31.92,101.76 arc-45 34.61,100.65 arc45 38.44,99.06 43.8,99.06 arc-45 45.72,98.27 arc-45 46.35,96.73 Q14.G
  Bottom 1.016: R17.1 D17.A
N$21
  Top 1.016: 17.62,106.05 R18.1 18.26,105.67 | 17.62,106.05 D18.A | Q13.G 34.29,96.44 arc45 33.34,98.74 arc45 30.27,100.01 28.12,100.01 arc-45 24.29,101.6 23.77,102.12 arc34 22.07,103.03 arc-45 19.63,104.04 17.62,106.05
  Bottom 1.016: D18.A R18.1
N$22
  Top 1.016: R19.1 11.91,106.05 | 11.91,106.05 D19.A | Q12.G 22.22,96.43 arc45 20.48,100.65 19.7,101.43 arc45 16.99,102.55 arc-45 14.28,103.68 11.91,106.05
  Bottom 1.016: D19.A R19.1
N$23
  Top 1.27: 121.28,113.64 136.67,113.64 arc-45 138.58,112.85
N$24
  Top 1.27: D14.A R14.1 9.52,17.84 arc-45 10.27,19.64 10.53,19.89 arc45 11.27,21.69 Q17.G
  Bottom 1.27: D14.A R14.1 9.52,17.77 arc-45 10.32,19.69 10.64,20 | Q17.G 11.27,21.76 arc-45 10.48,19.84
N$25
  Bottom 0.813: R25.1 160.97,112.89 arc45 163.9,105.81 170.9,98.81 arc-45 173.83,91.74 173.83,60.8 arc90 175.74,58.9 U$11.P$10
N$26
  Bottom 0.813: U$11.P$17 185.74,78.26 arc-90 187.17,79.69 193.36,79.69 arc-90 194.63,78.42 194.63,71.76 arc90 196.37,70.01 R30.1
N$27  (via drill 0.6 pad 1.42)
  Top 0.813: v173.83,48.74 173.83,18.57 arc-90 171.29,16.03 165.1,16.03 arc90 R26.1
  Bottom 0.813: U$11.P$8 175.74,53.82 arc90 173.83,51.91 v173.83,48.74
N$28
  Top 1.016: Q27.3 arc45 50.18,13.98 50.41,14.21 arc-45 53.66,15.56 57.06,15.56 arc-45 62.36,13.36 Q28.3
  Top 1.27: D14.C R14.2 D13.C R13.2 D12.C R12.2 D11.C R11.2 D23.C R41.2 D24.C R42.2 R23.2 41.59,7.78 arc-90 46.67,12.86 Q27.3
  Bottom 1.27: D14.C R14.2 D13.C R13.2 D12.C R12.2 D11.C R11.2 D23.C R41.2 D24.C R42.2 R23.2 41.59,7.78 arc-90 46.67,12.86 Q27.3
N$29
  Top 1.27: R24.2 D19.C R19.2 D18.C R18.2 D17.C R17.2 D16.C R16.2 D28.C R46.2 D27.C R45.2 arc-45 44.95,115.25 46.99,115.25 | 46.99,115.25 55.94,115.25 arc-45 Q26.3 | Q25.3 46.83,114.87 arc-45 46.99,115.25
  Bottom 1.27: R24.2 D19.C R19.2 D18.C R18.2 D17.C R17.2 D16.C R16.2 D28.C R46.2 D27.C R45.2
N$30  (via drill 0.6 pad 1.27)
  Top 0.813: v177.16,60.8 v177.16,48.74
  Bottom 0.813: R27.1 69.06,115.25 arc-90 72.23,118.43 160.5,118.43 arc-90 164.46,114.46 164.46,113.84 arc45 167.39,106.77 174.62,99.54 arc-45 177.16,93.4 v177.16,60.8 | v177.16,48.74 U$11.P$6
N$31
  Top 1.016: R25.2 arc-45 159.96,103.61 159.7,103.35 arc-45 157.79,102.55 154.16,102.55 arc-45 152.24,103.35 arc45 150.32,104.14 | 150.32,104.14 145.75,104.14 arc-45 138.68,107.07 Q21.1 | Q22.1 arc-90 150.97,104.14 150.32,104.14
N$32
  Top 1.27: R26.2 arc45 160.58,7.14 Q24.1 158.22,7.14 arc45 156.69,6.51 155.41,5.23 arc-45 153.51,4.45 148.44,4.45 arc-45 146.53,5.24 145.63,6.13 arc45 Q23.1
N$33
  Top 1.016: Q25.1 arc-45 50.35,105.7 50.96,105.09 arc45 53.26,104.14 56.6,104.14 arc45 58.9,105.09 59.9,106.1 arc-45 Q26.1 62.89,107 arc45 63.66,107.32 arc45 64.2,107.54 64.93,108.27 arc-45 66.46,108.9 67.31,108.9 arc-90 69.06,107.16 R27.2
N$34
  Top 1.27: Q27.1 47.47,6.99 arc90 50.8,3.65 59.37,3.65 arc90 Q28.1 arc90 68.1,12.38 R28.2
N$35  (via drill 3 pad 6)
  Top 1.016: Q2.S R21.2
  Top 1.27: Q21.2 143.03,110.01 arc-90 C7.-
  Bottom 0.813: U$11.P$9 170.02,56.36
  Bottom 1.016: R21.2 Q2.S
  Bottom 1.27: Q21.2 143.03,110.01 arc-90 C7.- 145.73,96.2 arc90 Q33.S
  other vias: 119.7,40.32 145.57,40.32
  pour Bottom (isolate 0.813, no thermals): 95.09,30.64 95.09,96.04 arc-90 96.36,97.31 98.27,97.31 arc-90 99.54,96.04 99.54,93.19 arc90 100.81,91.92 105.25,91.92 arc90 106.52,93.19 106.52,97.31 110.17,97.31 arc-90 111.44,96.04 111.44,93.19 arc90 112.71,91.92 117.32,91.92 arc90 118.59,93.19 118.59,97.31 122.24,97.31 arc-90 123.51,95.89 123.51,93.19 arc90 124.78,91.92 129.38,91.92 arc90 130.65,93.19 130.65,97.31 134.3,97.31 arc-90 135.57,96.04 135.57,93.19 arc90 136.84,91.92 141.45,91.92 arc90 142.72,93.19 142.72,97.31 146.69,97.31 arc-90 147.96,95.89 147.96,93.19 arc90 149.23,91.92 153.67,91.92 arc90 154.94,93.19 154.94,97.31 158.91,97.31 arc-90 160.18,96.04 160.18,93.19 arc90 161.45,91.92 170.66,91.92 arc-90 171.93,90.65 171.93,29.37 167.64,29.37 166.37,28.1 166.37,25.08 164.47,25.08 164.47,28.1 163.2,29.37 155.58,29.37 154.31,28.1 154.31,25.08 152.4,25.08 152.4,28.1 151.13,29.37 143.35,29.37 142.08,28.1 142.08,25.08 140.18,25.08 140.18,28.1 138.91,29.37 131.29,29.37 130.02,28.1 130.02,25.08 128.11,25.08 128.11,28.1 126.84,29.37 119.22,29.37 117.95,28.1 117.95,25.08 116.05,25.08 116.05,28.1 114.78,29.37 107.16,29.37 105.89,28.1 105.89,25.08 103.98,25.08 103.98,28.1 102.71,29.37 96.36,29.37 arc-90
N$36
  Top 1.27: Q22.2 148.11,110.01 arc-90 C7.+
  Bottom 1.27: C7.+ arc90 148.11,110.01 Q22.2 155.42,110.01 arc-90 158.11,107.32 D21.C
N$37
  Bottom 1.27: R30.2 200.5,62.39 arc90 202.72,64.61 Q30.1
N$38
  Top 0.61: IC3.8 212.09,43.5 arc90 210.34,41.75 R1.1
  Top 1.016: R1.1 C14.+ 210.34,31.19 arc45 IC2.3
N$39
  Top 2.184: DB-107.AC2 207.33,85.88 X2.2
  Top 5.08: C20.1 216.69,97.95
  Top 6.35: X1.1 216.69,97.95 X2.2
  Bottom 5.08: X2.2 X1.1
N$40
  Top 0.813: V-OUT.2 arc-90 214.95,69.37 201.94,69.37 arc45 200.02,68.58 arc-45 196.19,66.99 C21.+ arc-45 192.34,66.83 192.25,66.83 188.72,70.36 arc45 U$11.P$15
N$41
  Top 1.27: +FAN-.1 216.1,64.74 arc45 210.03,62.23 arc-45 208.11,61.44 207.01,61.44 arc-90 205.58,62.87 Q30.2
N$42
  Top 0.813: IC2.1 214.15,23.81 arc90 216.06,25.72 216.06,29.18 arc-90 SW-ON-OFF.1
N$43
  Top 0.61: IC3.1 217.92,38.94 arc90 R1.2
N$44
  Top 1.27: 153.99,109.86 153.83,109.86 arc-90 153.67,110.01
N$45
  Top 0.813: DB-107.+ arc-45 202.04,75.04 205.1,78.11 arc-45 210.47,80.33 R15.1
N$47
  Top 0.813: R20.1 arc45 207.85,75.29 DB-107.-
N$48
  Bottom 0.813: U$11.P$16 182.72,74.14 arc-90 180.34,76.52 180.34,94.28 arc45 177.41,101.35 171.29,107.47 arc-45 170.02,110.54 NTC10K.1
N$49
  Top 0.61: IC3.3 216.54,46.03 arc-90 215.58,46.99 215.58,50.01 arc-90 216.69,51.12 R29.2
N$50
  Bottom 2.184: DB-107.AC1 201.93,86.04 208.84,92.95
  Bottom 5.08: X2.1 214.15,87.64 208.84,92.95 1.P$1
N$51
  Top 0.813: K1.2 205.1,48.26 arc90 203.36,46.51 203.36,44.45 | 203.36,44.45 arc90 205.26,42.55 D6.A | 203.36,44.45 203.36,43.02 arc-90 Q6.1
N$52
  Bottom 3.81: C20.2 189.86,110.81 | 189.86,110.81 193.2,110.81 198.6,116.21 211.3,116.21 X1.2 | 1.P$2 190.18,110.49 189.86,110.81
N$53
  Top 0.61: R29.1 209.23,51.12 arc-90 207.64,52.71 207.64,54.13 arc-90 LED2.A
N$54
  Bottom 0.813: Q6.2 202.41,38.43 arc45 201.29,41.12 arc-45 200.98,41.88 200.98,51.11 arc-45 201.77,53.02 arc-45 204.07,53.98 R35.1
N$55
  Bottom 1.27: DB_107.AC2 197.17,84.96 | 197.17,84.96 arc-45 1.P$6 | R38.1 197.71,85.88 arc-45 197.33,86.04 197.33,85.35 arc-45 197.17,84.96
N$56
  Bottom 1.27: 1.P$4 190.18,86.22 | 190.18,86.22 arc45 DB_107.AC1 | R38.2 189.36,85.88 arc45 190.18,86.22
N$57  (via drill 0.5)
  Top 0.813: R40.2 v186.69,25.08 183.99,25.08 arc-90 181.61,27.46 181.61,41.11 arc-45 182.4,43.02 arc45 183.04,44.55 183.04,77.15 arc-90 185.1,79.22 189.71,79.22 arc-90 191.77,77.15 DB_107.+
  Top 1.016: R40.2 188.44,28.02 arc-45 R37.3
N$58
  Top 0.61: R35.2 216.38,53.98 arc90 214.47,52.07 214.47,46.04 arc90 215.74,44.77 IC3.2 arc-90 IC3.2
N$59
  Top 1.016: R37.2 arc45 190.69,33.3 C22.2 arc45 185.94,36.04 U$11.P$1
N$60  (via drill 0.5)
  Top 0.61: IC3.7 212.57,44.77 arc90 208.44,40.64 arc-45 206.75,36.58 v205.42,35.24 203.52,33.34 arc45 202.56,31.04 R32.2
  Top 1.27: R33.1 204.73,25.08 arc-45 203.2,25.72 arc-45 202.56,27.25 R32.2 R32.3 199.88,30.47 arc-45 R34.2 arc45 198.08,34.8 C24.2
N$62
  Top 1.016: R36.2 134.51,14.02 arc45 134.62,14.29 arc45 134.24,14.45 134.14,14.45 135.31,15.61 arc-45 137.48,16.51 145.56,16.51 arc45 147.48,17.3 arc-45 149.39,18.1 158.54,18.1 arc45 161.61,19.37 161.63,19.39 arc45 162.56,21.64 Q11.G
  Top 1.27: R36.2 D15.A
  Bottom 1.27: D15.A R36.2
N$63
  Top 1.016: R39.2 arc-45 129.49,15.98 130.02,16.51 arc-45 133.47,17.94 135.37,17.94 arc45 136.52,18.42 arc-45 138.82,19.37 147.92,19.37 arc45 149.07,19.84 149.56,20.34 arc45 150.49,22.59 Q16.G
  Top 1.27: R39.2 D20.A
  Bottom 1.27: D20.A R39.2
N$64
  Top 1.016: R41.1 arc-45 33.22,15.44 33.5,15.72 | 33.5,15.72 33.81,16.03 | Q29.G 59.69,22.1 arc-45 59.21,20.96 59.02,20.76 arc-45 56.04,19.53 48.4,19.53 arc45 45.72,18.42 arc-45 43.42,17.46 37.71,17.46 arc45 33.5,15.72
  Top 1.27: D23.A R41.1
  Bottom 1.27: R41.1 D23.A
N$65
  Top 1.016: Q31.G 71.75,22.47 arc-45 70.91,20.42 70.8,20.32 arc-45 68.89,19.53 61.99,19.53 arc45 59.69,18.57 arc-45 57.77,17.78 48.27,17.78 arc45 46.35,16.99 arc-45 43.67,15.88 41.81,15.88 arc45 36.83,13.81
  Top 1.27: D24.A 36.83,13.81 R42.1
  Bottom 1.27: R42.1 D24.A
N$66
  Top 1.016: 133.34,106.05 arc-45 135.25,105.25 135.83,104.67 arc45 138.27,103.66 138.95,103.66 arc-45 142.4,102.24 arc45 144.7,101.28 150.54,101.28 arc-45 153.99,99.85 arc45 155.52,99.22 163.19,99.22 arc-90 164.94,97.47 Q32.G
  Top 1.27: 133.34,106.05 R43.2
  Bottom 1.27: R43.2 D25.A
N$67
  Top 1.016: Q33.G 152.56,97.05 arc45 151.92,98.58 arc45 150.01,99.38 143.75,99.38 arc-45 141.45,100.33 arc45 138,101.76 137.26,101.76 arc-45 135.73,102.39 arc45 133.81,103.19 130.25,103.19 arc-45 127.95,104.14 126.6,105.49 arc45 125.25,106.05 arc-45 125.2,106.03 R44.2
  Top 1.27: R44.2 127.2,106.03 arc45 D26.A
  Bottom 1.27: D26.A 124.21,106.05 arc45 124.14,106.02
N$68
  Top 1.27: D5.C R5.1 D4.C R4.1 D3.C R3.1 D2.C R2.1 R21.1 | Q22.3 arc45 147.85,115.41 144.72,115.41 arc45 Q21.3
  Bottom 1.27: R21.1 R2.1 D2.C R3.1 D3.C R4.1 D4.C R5.1 D5.C 124.17,113.67 R44.1 127.23,113.65 D26.C 130.17,113.67 R43.1 D25.C 136.67,113.67 arc-45 Q21.3
N$69
  Top 1.016: D28.A R46.1 arc45 35.96,104.69 36.83,103.82 arc45 39.9,102.55 45.6,102.55 arc-45 49.05,101.12 arc45 50.2,100.65 66.37,100.65 arc-45 69.06,99.54 69.49,99.11 arc-45 70.48,96.69 Q35.G
  Bottom 1.016: R46.1 D28.A

## Text on the board
tPlace: High voltage area | FR107x6 | FR107x6 | NTC 10K | 100R | DB107x2 | V-OUT | 20K | 2200uF | 2200uF | 2200uF | 2200uF | 2200uF | 2200uF | Batt | R-X | 48V | 100K | 36V | 68K | 24V | OUT1 | OUT2 | 47K | S8050 | 12V | 20K | Over-Load | Low-batt | ON-OFF | Buck Area | FR107x6 | FR107x6 | GND | 2x6 mm